# Altium PCB Micromouse2019.PcbDoc (part 1 of 2)
Units mm, origin at the board's own origin, x right, y up, seen from the top; angles counter-clockwise.
Board outline 86.36 x 54.61 mm, 2 copper layers (Top Layer, Bottom Layer), stack 1.58 mm thick; 84 components, 88 nets, 396 pads, 110 vias.
Unrouted connection lines stored in the file: 1.
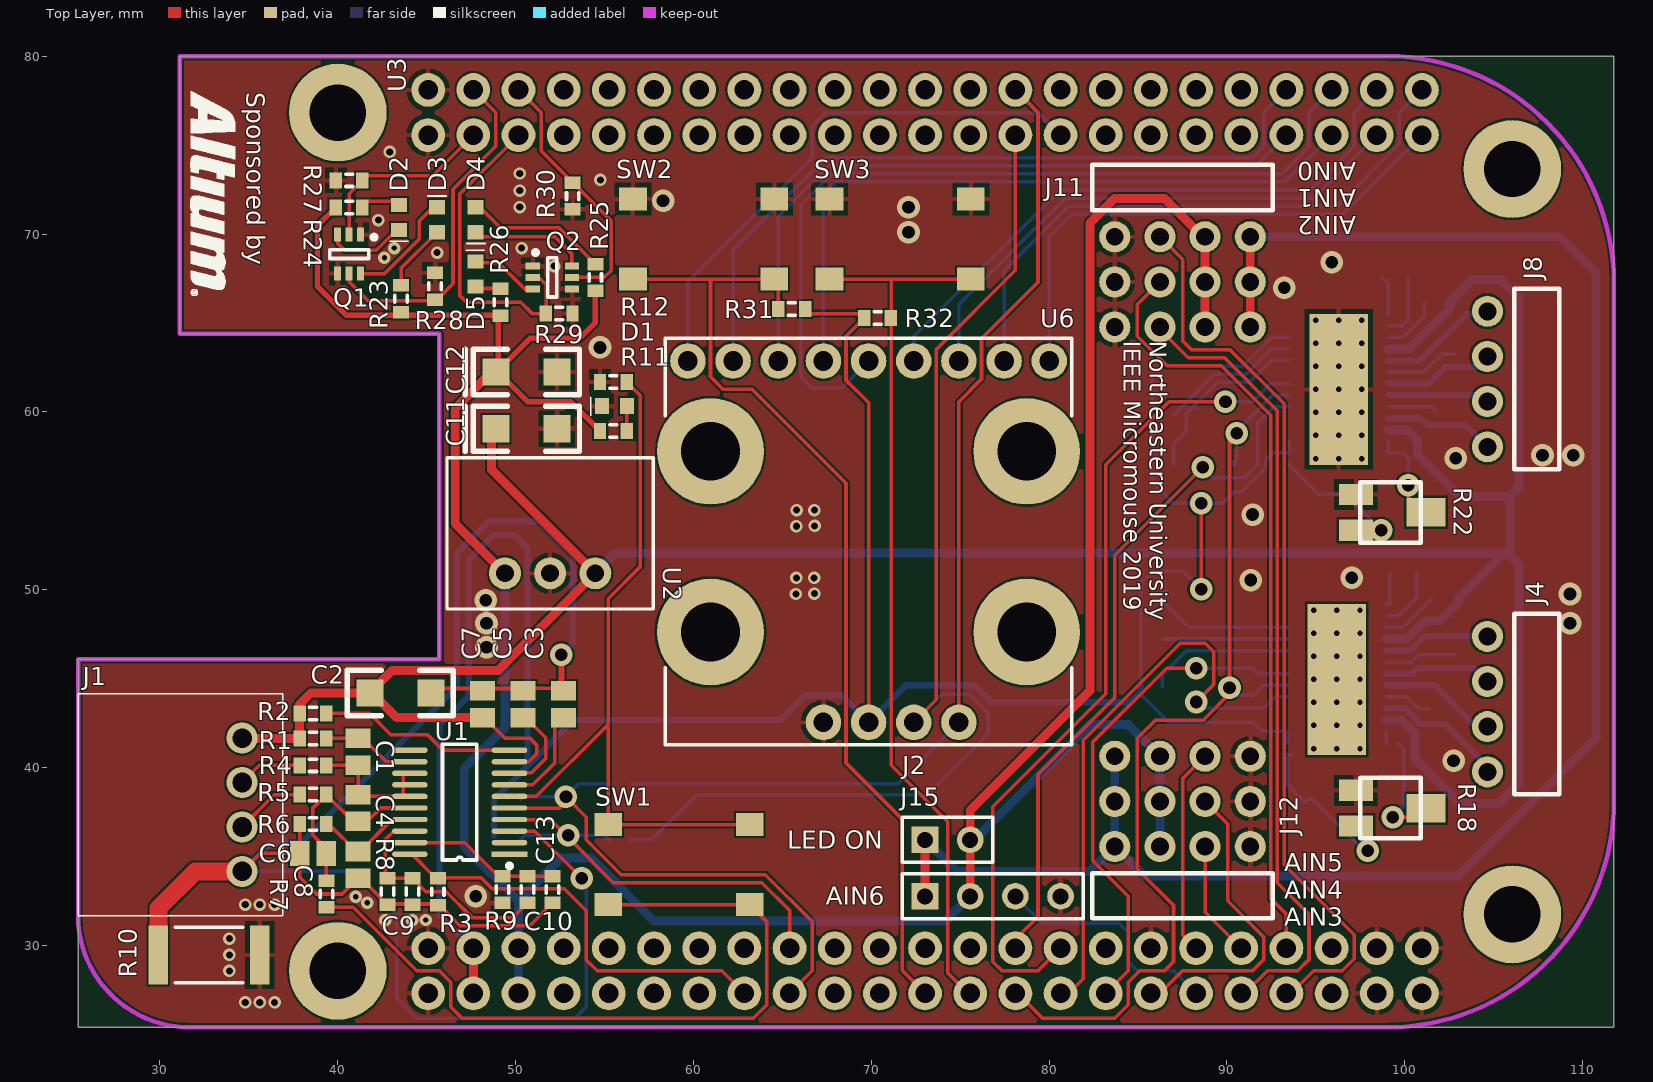
[diagram p0: Top Layer view]
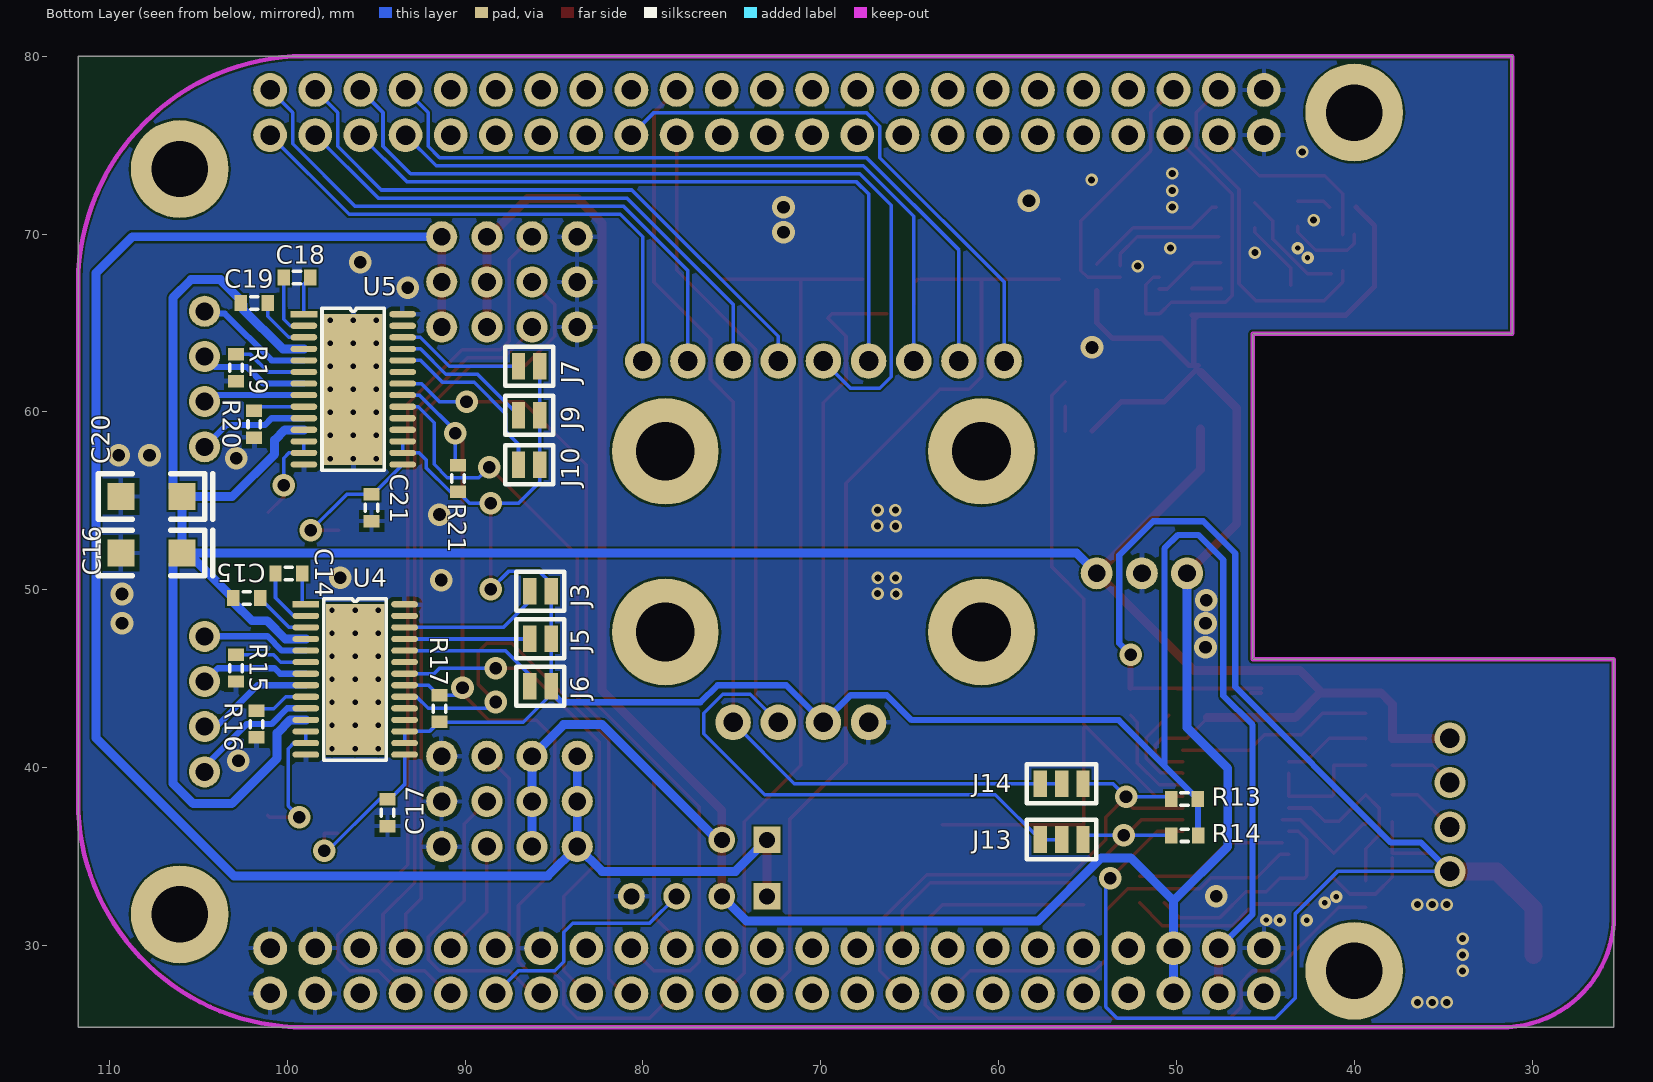
[diagram p1: Bottom Layer view, seen from below]

## Layer stack, top to bottom
Top Solder: solder mask 0.0102, Solder Resist, Dk 3.5
Top Layer: signal copper 0.0356
Dielectric 1: dielectric 1.5086, FR-4, Dk 4.8
Bottom Layer: signal copper 0.0356
Bottom Solder: solder mask 0.0102, Solder Resist, Dk 3.5

## Board outline
25.4,46.101 45.72,46.101 45.72,64.389 31.115,64.389 31.115,80.01 111.76,80.01 111.76,25.4 25.4,25.4

## Design rules (kind name [scope] priority, off if disabled: settings)
Clearance [All] p1: gap=0.127 ignorepadtopadclearanceinfootprint=TRUE
ComponentClearance ComponentClearance_1 [InComponent('U3')] p1: gap=0 collisioncheckmode=3 verticalgap=0 showdistances=FALSE
ComponentClearance [All] p2: gap=0.254 collisioncheckmode=3 verticalgap=0.254 showdistances=FALSE
HoleSize [All] p1: absolutevalues=TRUE maxlimit=6.3 minlimit=0.2 maxpercent=80.000 minpercent=20.000
MinimumAnnularRing [All] p1: minimumring=0.076
MinimumSolderMaskSliver [All] p1: minsoldermaskwidth=0
PolygonConnect [All] p1: thpad.connectstyle=Relief thpad.reliefconductorwidth=0.254 thpad.reliefentries=4 thpad.polygonreliefangle="90 Angle" thpad.airgapwidth=0.254 smdpad.connectstyle=Relief smdpad.reliefconductorwidth=0.254 smdpad.reliefentries=4 smdpad.polygonreliefangle="90 Angle" smdpad.airgapwidth=0.254 via.connectstyle=Direct via.reliefconductorwidth=0.254 via.reliefentries=4 via.polygonreliefangle="90 Angle" via.airgapwidth=0.254
RoutingVias [All] p1: holewidth=0.711 width=1.27 viastyle="Through Hole" minholewidth=0.2 minwidth=0.45 maxholewidth=0.711 maxwidth=1.27
SilkToSilkClearance [All] p1: silktosilkclearance=0
SilkToSolderMaskClearance [IsPad] p1: minsilkscreentomaskgap=0 clearancetoexposedcopper=TRUE
SolderMaskExpansion [All] p1: expansion=0.102
Width [All] p1: maxlimit=10 minlimit=0.127 preferedwidth=0.2
25 further rules are at their usual default settings.

## Classes and differential pairs
component class Peripherals: D2 D3 D4 D5 J11 J12 J13 J14 J15 Q1 Q2 R23 R24 R25 R26 R27 R28 R29 R30 R31 R32 SW2 SW3 U6
component class "Motor Drivers": C14 C15 C16 C17 C18 C19 C20 C21 J3 J4 J5 J6 J7 J8 J9 J10 R15 R16 R17 R18 R19 R20 R21 R22 U4 U5
component class Beaglebone: R13 R14 U3
component class "Battery Management": C1 C2 C3 C4 C5 C6 C7 C8 C9 C10 C11 C12 C13 D1 J1 J2 R1 R2 R3 R4 R5 R6 R7 R8 R9 R10 R11 R12 SW1 U1 U2

## Components (designator, comment, footprint, x,y, rotation, side; value= is the part's Value field where it differs from the comment)
C1 "CAP" C0805 41.148,40.894 r90 top value=1uF
C2 "CAP" 1206 41.808,44.196 r0 top value=10uF
C3 "CAP" C0805 52.705,43.561 r270 top value=1uF
C4 "CAP" C0805 41.148,37.731 r90 top value=1uF
C5 "CAP" C0805 50.419,43.561 r90 top value=4.7uF
C6 "CAP" C0805 38.608,35.179 r0 top value=1uF
C7 "CAP" C0805 48.133,43.561 r270 top value=1uF
C8 "CAP" C0805 41.136,34.532 r270 top value=1uF
C9 "CAP" J1-0603 44.196,33.032 r270 top value=0.1uF
C10 "CAP" J1-0603 50.673,33.147 r270 top value=0.1uF
C11 "CAP POL" 1206+ 48.895,59.055 r0 top value=10uF
C12 "CAP POL" 1206+ 48.895,62.245 r0 top value=10uF
C13 "CAP" J1-0603 52.07,33.147 r90 top value=0.1uF
C14 "CAP" J1-0603 99.908,50.915 r0 bottom value=10nF
C15 "CAP" J1-0603 102.278,49.53 r0 bottom value=0.1uF
C16 "CAP POL" 1206+ 105.918,52.07 r0 bottom value=10uF
C17 "CAP" J1-0603 94.361,37.465 r270 bottom value=0.47uF
C18 "CAP" J1-0603 99.453,67.564 r0 bottom value=10nF
C19 "CAP" J1-0603 101.854,66.13 r0 bottom value=0.1uF
C20 "CAP POL" 1206+ 105.918,55.245 r0 bottom value=10uF
C21 "CAP" J1-0603 95.25,54.61 r270 bottom value=0.47uF
D1 "LED" 0603-DI-GREEN 56.264,60.325 r180 top
D2 "LED" 0603-DI-GREEN 45.593,70.104 r90 top
D3 "LED" 0603-DI-GREEN 43.434,71.631 r270 top
D4 "LED" 0603-DI-GREEN 47.752,71.504 r270 top
D5 "LED" 0603-DI-GREEN 47.752,67.053 r90 top
J1 "JST-XH-4" JST-XH-4 34.62,34.163 r180 top
J2 "Header 2" HDR1X2 73.025,35.941 r0 top
J3 "JUMPER" JUMPER 85.16,49.911 r180 bottom
J4 "CONN_4x1" CONN_4x1 104.648,39.763 r90 top
J5 "JUMPER" JUMPER 85.16,47.244 r180 bottom
J6 "JUMPER" JUMPER 85.16,44.577 r180 bottom
J7 "JUMPER" JUMPER 85.795,62.574 r180 bottom
J8 "CONN_4x1" CONN_4x1 104.648,58.039 r90 top
J9 "JUMPER" JUMPER 85.795,59.817 r180 bottom
J10 "JUMPER" JUMPER 85.795,57.023 r180 bottom
J11 "CONN_4x3" CONN_4x3 91.313,69.85 r180 top
J12 "CONN_4x3" CONN_4x3 83.693,35.56 r0 top
J13 "JUMPER_3" JUMPER_3 56.458,35.959 r180 bottom
J14 "JUMPER_3" JUMPER_3 56.458,39.1 r0 bottom
J15 "CONN_4x1" HDR1X4 73.025,32.766 r0 top
Q1 "RN1907" SOT363-6L 40.64,68.877 r270 top
Q2 "RN1907" SOT363-6L 52.07,67.564 r0 top
R1 "" J1-0603 38.608,41.639 r0 top value=100
R2 "" J1-0603 38.608,43.053 r180 top value=100
R3 "" J1-0603 45.627,33.02 r90 top value=499K
R4 "" J1-0603 38.608,40.132 r0 top value=100
R5 "" J1-0603 38.608,38.481 r0 top value=100
R6 "" J1-0603 38.608,36.83 r0 top value=100
R7 "" J1-0603 39.358,32.894 r270 top value=10K
R8 "" J1-0603 42.799,33.032 r90 top value=100
R9 "" J1-0603 49.276,33.147 r90 top value=100
R10 "" RESC6332 32.766,29.464 r0 top value=50m
R11 "" J1-0603 55.499,58.928 r0 top value=220
R12 "" J1-0603 55.499,61.692 r180 top value=10K
R13 "" J1-0603 49.542,38.227 r180 bottom value=4.7K
R14 "" J1-0603 49.53,36.195 r180 bottom value=4.7K
R15 "" J1-0603 102.87,45.593 r270 bottom value=0.1
R16 "" J1-0603 101.727,42.448 r270 bottom value=0.1
R17 "" J1-0603 91.44,43.319 r270 bottom value=10K
R18 "POT ST32ETB103" ST32-EB 99.2,37.719 r270 top value=10K
R19 "" J1-0603 102.87,62.484 r270 bottom value=0.1
R20 "" J1-0603 101.854,59.309 r270 bottom value=0.1
R21 "" J1-0603 90.398,56.261 r270 bottom value=10K
R22 "POT ST32ETB103" ST32-EB 99.2,54.356 r270 top value=10K
R23 "" J1-0603 43.561,66.367 r270 top value=220
R24 "" J1-0603 40.64,71.501 r180 top value=220
R25 "" J1-0603 54.483,67.564 r270 top value=220
R26 "" J1-0603 49.149,66.167 r270 top value=220
R27 "" J1-0603 40.64,73.025 r0 top value=100K
R28 "" J1-0603 45.465,67.068 r270 top value=100K
R29 "" J1-0603 52.451,65.532 r180 top value=100K
R30 "" J1-0603 53.213,72.136 r90 top value=100K
R31 "" J1-0603 65.532,65.786 r180 top value=10K
R32 "" J1-0603 70.358,65.278 r0 top value=10K
SW1 "TACT SWITCH" "TACT SWITCH" 59.182,34.544 r180 top
SW2 "TACT SWITCH" "TACT SWITCH" 60.579,69.723 r180 top
SW3 "TACT SWITCH" "TACT SWITCH" 71.628,69.723 r180 top
U1 "bq76920" TSSOP20 49.657,35.131 r180 top
U2 "R-78BXX-XX" SIP-3 49.403,50.927 r0 top
U3 "Beaglebone Black" BEAGLEBONE_BLACK 25.4,25.4 r0 top locked
U4 "DRV8825" PP28 98.952,49.183 r180 bottom
U5 "DRV8825" PP28 99.06,65.495 r180 bottom
U6 "LSM9DS1 Breakout" "LSM9DS1 Breakout" 81.28,41.275 r90 top locked

## Footprints (in the part's own frame and the unit in brackets; to place one, negate y for a bottom-side part, rotate by r counter-clockwise, add the part's x,y. Pads: shape width x height; smd on the part's side, far side on the other; paste and mask are expansions set on the pad)
0603-DI-GREEN [mm] "1.6 x 0.8mm"
  rect 0.8x0.9 smd: 1(0,0) 2(1.4,0)
  silkscreen extent 2.04,-0.49 2.04,0.53, body extent -0.1,-0.4 1.5,0.4, height 0.6
1206 [mil]
  rect 60x60 smd: 1(0,0) 2(135,0)
  silkscreen extent -50,-50 185,50, body extent 6,-31 129,31, height 22
1206+ [mil]
  rect 60x60 smd: 1(0,0) 2(135,0)
  silkscreen extent -68,-50 185,50, body extent 0,-31 135,31, height 63
BEAGLEBONE_BLACK [mm]
  round 5.5 hole 3.175: 0(14.605,3.175) 0(14.605,51.435) 0(80.645,6.35) 0(80.645,48.26)
  round 1.9 hole 1.1: P8_1(19.685,50.165) P8_2(19.685,52.705) P8_3(22.225,50.165) P8_4(22.225,52.705) P8_5(24.765,50.165) P8_6(24.765,52.705) P8_7(27.305,50.165) P8_8(27.305,52.705) P8_9(29.845,50.165) P8_10(29.845,52.705) P8_11(32.385,50.165) P8_12(32.385,52.705) P8_13(34.925,50.165) P8_14(34.925,52.705) P8_15(37.465,50.165) P8_16(37.465,52.705) P8_17(40.005,50.165) P8_18(40.005,52.705) P8_19(42.545,50.165) P8_20(42.545,52.705) P8_21(45.085,50.165) P8_22(45.085,52.705) P8_23(47.625,50.165) P8_24(47.625,52.705) P8_25(50.165,50.165) P8_26(50.165,52.705) P8_27(52.705,50.165) P8_28(52.705,52.705) P8_29(55.245,50.165) P8_30(55.245,52.705) P8_31(57.785,50.165) P8_32(57.785,52.705) P8_33(60.325,50.165) P8_34(60.325,52.705) P8_35(62.865,50.165) P8_36(62.865,52.705) P8_37(65.405,50.165) P8_38(65.405,52.705) P8_39(67.945,50.165) P8_40(67.945,52.705) P8_41(70.485,50.165) P8_42(70.485,52.705) P8_43(73.025,50.165) P8_44(73.025,52.705) P8_45(75.565,50.165) P8_46(75.565,52.705) P9_1(19.685,1.905) P9_2(19.685,4.445) P9_3(22.225,1.905) P9_4(22.225,4.445) P9_5(24.765,1.905) P9_6(24.765,4.445) P9_7(27.305,1.905) P9_8(27.305,4.445) P9_9(29.845,1.905) P9_10(29.845,4.445) P9_11(32.385,1.905) P9_12(32.385,4.445) P9_13(34.925,1.905) P9_14(34.925,4.445) P9_15(37.465,1.905) P9_16(37.465,4.445) P9_17(40.005,1.905) P9_18(40.005,4.445) P9_19(42.545,1.905) P9_20(42.545,4.445) P9_21(45.085,1.905) P9_22(45.085,4.445) P9_23(47.625,1.905) P9_24(47.625,4.445) P9_25(50.165,1.905) P9_26(50.165,4.445) P9_27(52.705,1.905) P9_28(52.705,4.445) P9_29(55.245,1.905) P9_30(55.245,4.445) P9_31(57.785,1.905) P9_32(57.785,4.445) P9_33(60.325,1.905) P9_34(60.325,4.445) P9_35(62.865,1.905) P9_36(62.865,4.445) P9_37(65.405,1.905) P9_38(65.405,4.445) P9_39(67.945,1.905) P9_40(67.945,4.445) P9_41(70.485,1.905) P9_42(70.485,4.445) P9_43(73.025,1.905) P9_44(73.025,4.445) P9_45(75.565,1.905) P9_46(75.565,4.445)
C0805 [mm] "Chip Capacitor, Body 2.0x1.3mm, IPC High Density"
  rect 1.1x1.4 smd: 1(-0.75,0) 2(0.75,0)
  body extent -1.1,-0.72 1.1,0.72, height 1.4
CONN_4x1 [mm]
  round 1.75 hole 1.016: 1(0,0) 2(2.54,0) 3(5.08,0) 4(7.62,0)
  silkscreen extent -1.27,-4.04 8.89,-1.5
CONN_4x3 [mm]
  round 1.75 hole 1: 1(0,0) 2(2.54,0) 3(5.08,0) 4(7.62,0) 5(0,2.54) 6(2.54,2.54) 7(5.08,2.54) 8(7.62,2.54) 9(0,5.08) 10(2.54,5.08) 11(5.08,5.08) 12(7.62,5.08)
  silkscreen extent -1.27,-4.04 8.89,-1.5
HDR1X2 [mm] "Connector; Header; 2 Position"
  rect 1.5x1.5 hole 0.9: 1(0,0)
  round 1.5 hole 0.9: 2(2.54,0)
  silkscreen extent -1.27,-1.27 3.81,1.27
HDR1X4 [mm] "Connector; Header; 4 Position"
  rect 1.5x1.5 hole 0.9: 1(0,0)
  round 1.5 hole 0.9: 2(2.54,0) 3(5.08,0) 4(7.62,0)
  silkscreen extent -1.27,-1.27 8.89,1.27
J1-0603 [mm] "Chip Resistor, Body 1.6x0.8mm, IPC High Density"
  rect 0.7x0.9 smd: 1(-0.75,0) 2(0.75,0)
  silkscreen extent -0.2,-0.35 0.2,0.35, body extent -0.85,-0.48 0.85,0.48, height 0.9
JST-XH-4 [mm]
  round 1.75 hole 1.1: 1(0,-7.5) 2(0,-5) 3(0,-2.5) 4(0,0)
  silkscreen extent -2.3,-10 9.2,2.5, body extent -2.3,-9.95 9.2,2.45, height 6.15
JUMPER [mm]
  rect 0.75x1.5 smd: 1(-1.2,0) 2(0,0)
  silkscreen extent -1.95,-1.1 0.75,1.1
JUMPER_3 [mm]
  rect 0.75x1.5 smd: 1(-1.2,0) 2(0,0) 3(1.2,0)
  silkscreen extent -1.95,-1.1 1.95,1.1
"LSM9DS1 Breakout" [mm]
  round 6 hole 3.3: 0(6.35,20.32) 0(6.35,2.54) 0(16.51,2.54) 0(16.51,20.32)
  round 2 hole 1.1: 1(1.27,13.97) 2(1.27,11.43) 3(1.27,8.89) 4(1.27,6.35) 5(21.59,1.27) 6(21.59,3.81) 7(21.59,6.35) 8(21.59,8.89) 9(21.59,11.43) 10(21.59,13.97) 11(21.59,16.51) 12(21.59,19.05) 13(21.59,21.59)
  silkscreen extent 0,0 22.86,22.86
PP28 [mm]
  rect 1.5x0.35 smd: 1(0,0)
  oval 1.5x0.35 smd: 2(0,-0.65) 3(0,-1.3) 4(0,-1.95) 5(0,-2.6) 6(0,-3.25) 7(0,-3.9) 8(0,-4.55) 9(0,-5.2) 10(0,-5.85) 11(0,-6.5) 12(0,-7.15) 13(0,-7.8) 14(0,-8.45) 15(5.55,-8.45) 16(5.55,-7.8) 17(5.55,-7.15) 18(5.55,-6.5) 19(5.55,-5.85) 20(5.55,-5.2) 21(5.55,-4.55) 22(5.55,-3.9) 23(5.55,-3.25) 24(5.55,-2.6) 25(5.55,-1.95) 26(5.55,-1.3) 27(5.55,-0.65) 28(5.55,0)
  rect 3.3x8.5 all layers, no hole: 29(2.775,-4.225)
  silkscreen extent 1.02,-8.78 4.52,0.33, body extent 0.53,-9.13 5.02,0.67, height 1.2
RESC6332 [mm] "Chip Resistor, Body 6.3x3.2mm, IPC High Density"
  rect 1.1x3.3 smd: 1(-2.85,0) 2(2.85,0)
  silkscreen extent -1.9,-1.55 1.9,1.55, body extent -3.22,-1.68 3.22,1.68, height 0.9
SIP-3 [mm]
  round 1.8 hole 1: 1(5.08,0) 2(2.54,0) 3(0,0)
  silkscreen extent -3.26,-2 8.34,6.5, body extent -3.26,-2 8.34,6.5, height 10.4
SOT363-6L [mm] "SOT363, 6-Leads, Body 2x1.3mm, Pitch 0.65mm, Lead Span 2.1mm, IPC High Density"
  rect 0.8x0.4 smd: 1(-1.1,0.65) 2(-1.1,0) 3(-1.1,-0.65) 4(1.1,-0.65) 5(1.1,0) 6(1.1,0.65)
  silkscreen extent -1.07,-1.1 0.25,1.53, body extent -1.15,-1.1 1.15,1.1, height 1
ST32-EB [mm]
  rect 1.2x1.9 smd: 1(1,-1.95) 3(-1,-1.95)
  rect 1.6x2.2 smd: 2(0,2)
  silkscreen extent -1.7,-1.7 1.7,1.7, body extent -1.7,-2.17 1.7,2.23, height 2
"TACT SWITCH" [mm]
  rect 1.55x1.3 smd: 1(-3.975,2.25) 2(3.975,2.25) 3(-3.975,-2.25) 4(3.975,-2.25)
  body extent -3,-3 3,3, height 5
TSSOP20 [mm]
  rect 2x0.3 smd: 1(0,0)
  oval 2x0.3 smd: 2(0,-0.65) 3(0,-1.3) 4(0,-1.95) 5(0,-2.6) 6(0,-3.25) 7(0,-3.9) 8(0,-4.55) 9(0,-5.2) 10(0,-5.85) 11(5.6,-5.85) 12(5.6,-5.2) 13(5.6,-4.55) 14(5.6,-3.9) 15(5.6,-3.25) 16(5.6,-2.6) 17(5.6,-1.95) 18(5.6,-1.3) 19(5.6,-0.65) 20(5.6,0)
  silkscreen extent -0.13,-6.18 3.76,0.79, body extent 0.6,-6.17 5,0.33, height 1.2

## Part data
C1 C3 C4 C6 C7 C8: "CAP CER 1UF 25V X7R 0805", Manufacturer="Murata Electronics North America", Manufacturer Part Number=GCM21BR71E105KA56L, Operating Temperature="-55°C ~ 125°C", Package / Case="0805 (2012 Metric)", Ratings=AEC-Q200, Supplier Part Number 1=490-4785-1-ND, Temperature Coefficient=X7R, Tolerance=±10%, Voltage - Rated=25V, Applications=Automotive, Category=Capacitors, ComponentLink1Description=http://search.murata.co.jp/Ceramy/image/img/A01X/G101/ENG/GCM21BR71E105KA56-01.pdf, ComponentLink1URL=http://search.murata.co.jp/Ceramy/image/img/A01X/G101/ENG/GCM21BR71E105KA56-01.pdf, Features=-, Height - Seated (Max)=-, Lead Spacing=-, Lead Style=-, Mounting Type="Surface Mount, MLCC", Packaging="Cut Tape (CT)", Part Status=Active, Pricing 1="1=0.29, 10=0.198, 100=0.1122, 500=0.07918, 1000=0.06927 (USD)", RoHS="RoHS Compliant", Size / Dimension="0.079\" L x 0.049\" W (2.00mm x 1.25mm)", Stock 1=30000, Supplier 1=Digi-Key, Thickness (Max)="0.055\" (1.40mm)"
C2: "CAP CER 10UF 50V X5R 1206", Manufacturer="Murata Electronics North America", Manufacturer Part Number=GRT31CR61H106KE01L, Operating Temperature="-55°C ~ 85°C", Package / Case="1206 (3216 Metric)", Ratings=AEC-Q200, Supplier Part Number 1=490-12456-1-ND, Temperature Coefficient=X5R, Tolerance=±10%, Voltage - Rated=50V, Applications=Automotive, Category=Capacitors, ComponentLink1Description=http://search.murata.co.jp/Ceramy/image/img/A01X/G101/ENG/GRT31CR61H106KE01-01.pdf, ComponentLink1URL=http://search.murata.co.jp/Ceramy/image/img/A01X/G101/ENG/GRT31CR61H106KE01-01.pdf, Features=-, Height - Seated (Max)=-, Lead Spacing=-, Lead Style=-, Mounting Type="Surface Mount, MLCC", Packaging="Cut Tape (CT)", Part Status=Active, Pricing 1="1=0.89, 10=0.633, 100=0.4166, 500=0.30856, 1000=0.26228 (USD)", RoHS="RoHS Compliant", Size / Dimension="0.126\" L x 0.063\" W (3.20mm x 1.60mm)", Stock 1=20000, Supplier 1=Digi-Key, Thickness (Max)="0.071\" (1.80mm)"
C5: "CAP CER 4.7UF 10V X7R 0805", Manufacturer="Samsung Electro-Mechanics", Manufacturer Part Number=CL21B475KPFNNNE, Operating Temperature="-55°C ~ 125°C", Package / Case="0805 (2012 Metric)", Ratings=-, Supplier Part Number 1=1276-2972-1-ND, Temperature Coefficient=X7R, Tolerance=±10%, Voltage - Rated=10V, Applications="General Purpose", Category=Capacitors, ComponentLink1Description=http://www.samsungsem.com/kr/support/product-search/mlcc/CL21B475KPFNNNE.jsp, ComponentLink1URL=http://www.samsungsem.com/kr/support/product-search/mlcc/CL21B475KPFNNNE.jsp, Features=-, Height - Seated (Max)=-, Lead Spacing=-, Lead Style=-, Mounting Type="Surface Mount, MLCC", Notification="Current market demand for these product types have resulted in fluctuating and extending lead times. Lead times may differ.", Packaging="Cut Tape (CT)", Part Status=Active, Pricing 1="1=0.28, 10=0.19, 100=0.0963, 500=0.06588, 1000=0.05828 (USD)", RoHS="RoHS Compliant", Size / Dimension="0.079\" L x 0.049\" W (2.00mm x 1.25mm)", Stock 1=20000, Supplier 1=Digi-Key, Thickness (Max)="0.053\" (1.35mm)"
C9 C10 C13 C15 C19: "CAP CER 0.1UF 50V X7R 0603", Supplier Part Number 1=399-6856-1-ND, Voltage Rating=50V, Supplier 1=Digi-Key
C11 C12 C16 C20: "CAP TANT 10UF 10% 20V 1206", Supplier Part Number 1=478-8273-1-ND, Voltage Rating=20V, LatestRevisionDate=17-Jul-2002, LatestRevisionNote="Re-released for DXP Platform.", PackageDescription="Polarized Capacitor (Radial); 2 Leads", PackageReference=RB7.6-15, Published=8-Jun-2000, Publisher="Altium Limited", Supplier 1=Digi-Key
C14 C18: "CAP CER 10000PF 50V X7R 0603", Supplier Part Number 1=311-1085-1-ND, Voltage Rating=50V, Supplier 1=Digi-Key
C17 C21: "CAP CER 0.47UF 16V X7R 0603", Supplier Part Number 1=490-3295-1-ND, Voltage Rating=16V, Supplier 1=Digi-Key
D1: "LED GREEN CLEAR CHIP SMD", Supplier Part Number 1=160-1888-1-ND, LatestRevisionDate=17-Jul-2002, LatestRevisionNote="Re-released for DXP Platform.", PackageDescription="SM LED; 2 Flat Leads", PackageReference=3.2X1.6X1.1, PackageVersion=Feb-2002, Published=8-Jun-2000, Publisher="Altium Limited", Supplier 1=Digi-Key
D2 D3 D4 D5: "LED BLUE CLEAR CHIP SMD", Supplier Part Number 1=160-1647-1-ND, LatestRevisionDate=17-Jul-2002, LatestRevisionNote="Re-released for DXP Platform.", PackageDescription="SM LED; 2 Flat Leads", PackageReference=3.2X1.6X1.1, PackageVersion=Feb-2002, Published=8-Jun-2000, Publisher="Altium Limited", Supplier 1=Digi-Key
J1: "CONN HEADER R/A 4POS 2.5MM", Current Rating=3A, Insulation Color=Natural, Manufacturer="JST Sales America Inc.", Manufacturer Part Number=S4B-XH-A(LF)(SN), Material Flammability Rating="UL94 V-0", Operating Temperature="-25°C ~ 85°C", Supplier Part Number 1=455-2243-ND, Voltage Rating=250V, Applications=-, Category="Connectors, Interconnects", ComponentLink1Description=http://www.jst-mfg.com/product/pdf/eng/eXH.pdf, ComponentLink1URL=http://www.jst-mfg.com/product/pdf/eng/eXH.pdf, Connector Type=Header, Contact Finish - Mating=Tin, Contact Finish - Post=Tin, Contact Finish Thickness - Mating=-, Contact Finish Thickness - Post=-, Contact Length - Mating=-, Contact Length - Post="0.134\" (3.40mm)", Contact Material=Brass, Contact Shape=Square, Contact Type="Male Pin", Fastening Type="Detent Lock", Features=-, Ingress Protection=-, Insulation Height="0.240\" (6.10mm)", Insulation Material="Polyamide (PA66), Nylon 6/6", Mated Stacking Heights=6.1mm, Mounting Type="Through Hole, Right Angle", Number of Positions=4, Number of Positions Loaded=All, Number of Rows=1, Overall Contact Length=-, Packaging=Bulk, Part Status=Active, Pitch - Mating="0.098\" (2.50mm)", Pricing 1="1=0.27, 10=0.257, 100=0.1785, 500=0.151, 1000=0.12355, 5000=0.10982, 10000=0.09953 (USD)", RoHS="RoHS Compliant", Row Spacing - Mating=-, Shrouding="Shrouded - 4 Wall", Stock 1=46156, Style="Board to Cable/Wire", Supplier 1=Digi-Key, Termination="Press-Fit, Solder"
J2: "Header, 2-Pin", LatestRevisionDate=17-Jul-2002, LatestRevisionNote="Re-released for DXP Platform.", Publisher="Altium Limited"
J4 J8: "CONN HEADER 4POS .100 R/A 30AU", Current Rating=-, Insulation Color=Black, Manufacturer="Amphenol FCI", Manufacturer Part Number=68016-104HLF, Material Flammability Rating="UL94 V-0", Supplier Part Number 1=609-3312-ND, Applications=-, Category="Connectors, Interconnects", ComponentLink1Description=http://cdn.amphenol-icc.com/media/wysiwyg/files/drawing/68015.pdf, ComponentLink1URL=http://cdn.amphenol-icc.com/media/wysiwyg/files/drawing/68015.pdf, Connector Type=Header, Contact Finish - Mating="Gold or Gold, GXT™", Contact Finish - Post=-, Contact Finish Thickness - Mating="30µin (0.76µm)", Contact Finish Thickness - Post=-, Contact Length - Mating="0.230\" (5.84mm)", Contact Length - Post="0.120\" (3.05mm)", Contact Material="Phosphor Bronze", Contact Shape=Square, Contact Type="Male Pin", Fastening Type=Push-Pull, Features=-, Ingress Protection=-, Insulation Height="0.095\" (2.41mm)", Insulation Material=-, Mated Stacking Heights=-, Mounting Type="Through Hole, Right Angle", Number of Positions=4, Number of Positions Loaded=All, Number of Rows=1, Operating Temperature=-, Overall Contact Length=-, Packaging=Bulk, Part Status=Active, Pitch - Mating="0.100\" (2.54mm)", Pricing 1="1=0.41, 10=0.385, 100=0.2697, 500=0.23122, 1000=0.19268, 5000=0.16515, 10000=0.15414 (USD)", RoHS="RoHS Compliant", Row Spacing - Mating=-, Shrouding=Unshrouded, Stock 1=5255, Style="Board to Board", Supplier 1=Digi-Key, Termination=Solder, Voltage Rating=-
J11 J12: "CONN HEADER R/A 12POS 2.54MM", Supplier Part Number 1=SAM8998-ND, Supplier 1=Digi-Key
Q1 Q2: "TRANS 2NPN PREBIAS 0.2W US6", Supplier Part Number 1=RN1907LF(CTCT-ND, Supplier 1=Digi-Key
R1 R2 R4 R5 R6 R8 R9: library part Res1, "RES SMD 100 OHM 1% 1/10W 0603", Supplier Part Number 1=311-100HRCT-ND, Tolerance=1%, Supplier 1=Digi-Key
R3: library part Res1, "RES SMD 499K OHM 1% 1/10W 0603", Supplier Part Number 1=311-499KHRCT-ND, Supplier 1=Digi-Key
R7 R12 R17 R21 R31 R32: library part Res1, "RES SMD 10K OHM 5% 1/10W 0603", Supplier Part Number 1=311-10KGRCT-ND, Supplier 1=Digi-Key
R10: library part Res1, "RES 0.05 OHM 1% 1W 2512", Power Rating=1W, Supplier Part Number 1=311-0.05TCT-ND, Tolerance=1%, Supplier 1=Digi-Key
R11 R23 R24 R25 R26: library part Res1, "RES SMD 220 OHM 5% 1/10W 0603", Supplier Part Number 1=311-220GRCT-ND, Supplier 1=Digi-Key
R13 R14: library part Res1, "RES SMD 4.7K OHM 5% 1/10W 0603", Supplier Part Number 1=311-4.7KGRCT-ND, Supplier 1=Digi-Key
R15 R16 R19 R20: library part Res1, "RES 0.1 OHM 1% 1/3W 0603", Supplier Part Number 1=P17478CT-ND, Supplier 1=Digi-Key
R18 R22: "10K Trimmer Potentiometer", Supplier Part Number 1=ST32ETB103CT-ND, LatestRevisionDate=17-Jul-2002, LatestRevisionNote="Re-released for DXP Platform.", PackageDescription="Variable Resistor, Thru-Hole; 3 Leads", PackageReference=VR5, Published=8-Jun-2000, Publisher="Altium Limited", Set Position=0.5, Sim Note="Enter the Resistance value and the set point into parameter fields.", Supplier 1=Digi-Key
R27 R28 R29 R30: library part Res1, "RES SMD 100K OHM 5% 1/10W 0603", Supplier Part Number 1=311-100KGRCT-ND, Supplier 1=Digi-Key
SW1 SW2 SW3: "SWITCH TACTILE SPST-NO 0.05A 12V", Contact Rating @ Voltage="0.05A @ 12VDC", Illumination Type, Color=-, Manufacturer=C&K, Manufacturer Part Number="PTS645SL50SMTR92 LFS", Operating Force=130gf, Operating Temperature="-20°C ~ 60°C", Supplier Part Number 1=CKN9088CT-ND, Actuator Height off PCB, Vertical=5.00mm, Actuator Length, Right Angle=-, Actuator Material="Polyamide (PA66), Nylon 6/6", Actuator Orientation="Top Actuated", Actuator Type=Standard, Category=Switches, Circuit=SPST-NO, ComponentLink1Description=https://www.ckswitches.com/media/1471/pts645.pdf, ComponentLink1URL=https://www.ckswitches.com/media/1471/pts645.pdf, Features=-, Illumination=Non-Illuminated, Illumination Voltage (Nominal)=-, Ingress Protection=-, Mechanical Life="100,000 Cycles", Mounting Type="Surface Mount", Outline="6.00mm x 6.00mm", Packaging="Cut Tape (CT)", Part Status=Active, Pricing 1="1=0.22, 10=0.215, 25=0.2076, 50=0.2002, 100=0.1891, 250=0.17796, 500=0.17054 (USD)", RoHS="RoHS Compliant", Stock 1=42939, Supplier 1=Digi-Key, Switch Function=Off-Mom, Switch Travel=-, Termination Style="Gull Wing"
U1: "IC BATT MGMT LI-ION AFE 20TSSOP", Supplier Part Number 1=296-39960-1-ND, Supplier 1=Digi-Key
U2: "DC DC CONVERTER 5V", Current - Output (Max)=2A, Manufacturer="Recom Power", Manufacturer Part Number=R-78B5.0-2.0, Operating Temperature="-40°C ~ 70°C", Package / Case="3-SIP Module", Supplier Device Package=-, Supplier Part Number 1=945-3042-ND, Voltage - Input (Max)=32V, Voltage - Input (Min)=6.5V, Voltage - Output 1=5V, Applications="ITE (Commercial)", Category="Power Supplies - Board Mount", ComponentLink1Description=https://www.recom-power.com/pdf/Innoline/R-78Bxx-2.0.pdf, ComponentLink1URL=https://www.recom-power.com/pdf/Innoline/R-78Bxx-2.0.pdf, Control Features=-, Efficiency=94%, Features="OTP, SCP", Mounting Type="Through Hole", Packaging=Tube, Part Status=Active, Pricing 1="1=9.87, 5=9.792, 10=9.718, 42=9.5681, 84=9.26905, 126=8.37198, 252=8.2225, 504=8.073 (USD)", RoHS="RoHS Compliant", Size / Dimension="0.45\" L x 0.33\" W x 0.69\" H (11.5mm x 8.5mm x 17.5mm)", Stock 1=3257, Supplier 1=Digi-Key, Type="Linear Regulator Replacement", Voltage - Output 2=-, Voltage - Output 3=-
U4 U5: "IC MOTOR DRIVER PAR 28HTSSOP", Current - Output=2.5A, Manufacturer="Texas Instruments", Manufacturer Part Number=DRV8825PWPR, Operating Temperature="-40°C ~ 150°C (TJ)", Package / Case="28-TSSOP (0.173\", 4.40mm Width) Exposed Pad", Supplier Device Package=28-HTSSOP, Supplier Part Number 1=296-29503-1-ND, Voltage - Load="8.2 V ~ 45 V", Applications="General Purpose", Category="Integrated Circuits (ICs)", ComponentLink1Description=http://www.ti.com/lit/ds/symlink/drv8825.pdf, ComponentLink1URL=http://www.ti.com/lit/ds/symlink/drv8825.pdf, Function="Driver - Fully Integrated, Control and Power Stage", Interface=Logic, Motor Type - AC, DC=-, Motor Type - Stepper=Bipolar, Mounting Type="Surface Mount", Output Configuration="Half Bridge (4)", Packaging="Cut Tape (CT)", Part Status=Active, Pricing 1="1=3.93, 10=3.53, 100=2.8922, 500=2.46212, 1000=2.07648 (USD)", RoHS="RoHS Compliant", Step Resolution="1 ~ 1/32", Stock 1=21013, Supplier 1=Digi-Key, Technology="Power MOSFET", Voltage - Supply="8.2 V ~ 45 V"
U6: "SPARKFUN 9 DEGREES OF FREEDOM IM", Supplier Part Number 1=1568-1257-ND, Supplier 1=Digi-Key

## Via types
v1: diameter 0.7, hole 0.3, Top Layer to Bottom Layer, 42 vias
v2: diameter 1.27, hole 0.711, Top Layer to Bottom Layer, tented both sides, 35 vias
v3: diameter 0.7, hole 0.4, Top Layer to Bottom Layer, tented both sides, 26 vias
v4: diameter 0.7, hole 0.3, Top Layer to Bottom Layer, tented both sides, 7 vias

## Nets (pads, with @x,y where several pads share a name; then routed paths per layer and width w, separated by ;. In a path a pad name is that pad's centre, name@x,y a point inside that pad or via, vN(x,y) a via of type N, cw(c..) or ccw(c..) an arc to the next point about the centre after c; other vN are vias at no path point)
3.3V: J3.2 J5.2 J6.2 J7.2 J9.2 J10.2 R13.2 R14.2 R17.2 R21.2 R31.1 R32.1 U3.P9_3 U3.P9_4 U4.16 U4.17 U5.16 U5.17 U6.2 | length 154.3
  Top Layer w0.2: R31.1@66.294,65.532 69.354,65.532 R32.1 68.58,64.25 68.58,61.778 69.85,60.508 U6.2 ; v2(88.546,50.038) v2(88.546,54.864)
  Top Layer w0.5: U3.P9_3 U3.P9_4
  Bottom Layer w0.2: J7.2 J9.2 J10.2 85.795,56.064 86.995,54.864 v2(88.546,54.864) 89.751,54.864 R21.2 90.841,55.511 92.194,56.864 92.194,57.307 92.582,57.695 U5.16 U5.17 ; v2(88.546,50.038) 87.53,51.054 85.852,51.054 85.16,50.362 J3.2 J5.2 J6.2 85.16,44.126 86.729,42.557 91.478,42.557 92.002,42.033 U4.17 U4.16
  Bottom Layer w0.35: U3.P9_4 45.72,31.75 45.72,42.399 47.362,44.041 47.362,51.68 48.768,53.086 49.911,53.086 50.673,52.324 50.673,40.166 ; R14.2 R13.2@48.78,38.227 ; R13.2 53.237,42.672 64.897,42.672 66.294,44.069 68.326,44.069 U6.2 71.938,44.633 75.804,44.633 76.766,43.671 84.565,43.671 85.16,44.266 J6.2
5V: C12.1 J2.2 J11.2 J11.6 J11.10 J12.2 J12.6 J12.10 J15.2 R11.1 R23.2 R24.2 R25.2 R26.2 U2.3 U3.P9_5 U3.P9_6 | length 175.4
  Top Layer w0.2: J11.2@88.646,69.85 J11.2
  Top Layer w0.3: R24.2 38.862,70.473 38.862,67.044 40.465,65.441 R26.2@49.125,65.441 ; C12.1@48.768,62.611 49.288,62.611 50.812,64.135 53.594,64.135 54.483,65.024 R25.2 ; R26.2@48.768,65.441 49.022,65.187 49.022,62.599 48.838,62.414 50.673,60.579 53.098,60.579 R11.1
  Top Layer w0.5: C12.1@48.641,62.23 46.609,60.198 46.609,53.721 U2.3 ; J15.2 J2.2 75.565,37.592 82.296,44.323 82.296,70.612 83.693,72.009 86.487,72.009 J11.2@88.646,69.85 ; J11.10 J11.6 J11.2
  Bottom Layer w0.2: J15.2@75.565,32.639 J15.2
  Bottom Layer w0.5: U2.3 49.403,42.251 47.117,39.965 47.117,35.56 50.165,32.512 ; U3.P9_5 U3.P9_6 50.165,32.512 ; J15.2 74.168,31.369 57.785,31.369 54.229,34.925 52.578,34.925 50.165,32.512 ; J2.2 75.819,35.941 82.296,42.418 84.455,42.418 J12.10 J12.6 J12.2
AIN0: J11.3 U3.P9_39 | length 51.6
  Top Layer w0.2: J11.3 87.503,68.58 87.503,64.008 88.011,63.5 90.17,63.5 93.218,60.452 93.218,34.544 97.155,30.607 97.155,29.255 96.475,28.575 94.888,28.575 93.618,27.305 U3.P9_39
  Bottom Layer w0.2: J11.3@85.598,69.85 J11.3
AIN1: J11.7 U3.P9_40 | length 43.9
  Top Layer w0.2: J11.7 84.963,66.04 84.963,64.262 86.633,62.592 89.681,62.592 92.456,59.817 92.456,32.639 93.345,31.75 U3.P9_40
  Bottom Layer w0.2: J11.7@85.598,67.31 J11.7
AIN2: J11.11 U3.P9_37 | length 45.5
  Top Layer w0.2: J11.11@86.166,64.703 87.823,63.046 89.862,63.046 92.837,60.071 92.837,33.528 94.615,31.75 94.615,29.21 93.98,28.575 92.277,28.575 91.007,27.305 U3.P9_37 ; J11.11 J11.11@86.922,64.77
AIN3: J12.3 U3.P9_38 | length 6.6
  Top Layer w0.2: J12.3 88.773,31.877 U3.P9_38
AIN4: J12.7 U3.P9_33 | length 17.4
  Top Layer w0.2: U3.P9_33 86.233,27.305 87.503,28.575 91.44,28.575 92.075,29.21 92.075,30.48 90.043,32.512 90.043,36.83 J12.7
AIN5: J12.11 U3.P9_36 | length 11.6
  Top Layer w0.2: U3.P9_36 87.503,30.607 87.503,39.37 J12.11
AIN6: J15.3 U3.P9_35 | length 13.4
  Bottom Layer w0.2: J15.3 79.629,31.242 83.947,31.242 84.455,30.734 84.455,29.083 84.963,28.575 86.995,28.575 U3.P9_35
BAT: R2.1 U1.10 | length 11.2
  Top Layer w0.2: R2.1 41.783,43.053 42.989,41.846 45.045,41.846 45.91,40.981 U1.10
BAT_GND: C2.2 C3.1 C5.2 C6.1 C7.1 C8.2 C9.2 C13.1 J1.4 R3.1 R6.1 R8.1 R10.1 U1.3 | length 117.1
  Top Layer w0.2: J1.4 35.636,35.179 C6.1 R6.1 R6.1@37.858,36.957 ; C6.1@37.858,34.925 37.858,33.843 38.807,32.894 40.248,32.894 C8.2 41.299,33.782 R8.1@42.75,32.331 ; R8.1@42.599,32.331 R8.1@42.75,32.331 ; R8.1 R8.1@42.75,32.331 ; C2.2@45.212,44.45 C5.2@49.948,44.45 ; C2.2 C2.2@45.825,44.196 ; R3.1 45.566,32.331 R8.1@42.75,32.331 ; R3.1@45.945,32.033 46.863,31.115 50.788,31.115 C13.1 ; U1.3 51.072,36.431 v2(53.721,33.782) ; C5.2@49.948,44.472 C3.1@52.578,44.472
  Top Layer w0.35: C3.1@52.578,44.472 v2(52.578,46.355)
  Top Layer w1: R10.1 29.916,32.088 31.991,34.163 J1.4
  Bottom Layer w0.2: J1.4 40.943,34.163 43.307,31.799 43.307,27.051 44.45,25.908 53.34,25.908 53.975,26.543 53.975,33.528 v2(53.721,33.782)
  Bottom Layer w0.35: J1.4 36.245,35.788 37.939,35.788 46.698,44.547 46.698,52.048 48.498,53.848 51.308,53.848 53.213,51.943 53.213,46.99 v2(52.578,46.355)
BMS_ALERT: R3.2 U1.20 U3.P9_15 | length 24.1
  Top Layer w0.2: U1.20@43.676,35.131 U1.20 44.174,35.131 45.489,33.816 48.056,33.816 48.679,33.193 52.74,33.193 53.975,31.958 53.975,29.186 54.586,28.575 61.595,28.575 U3.P9_15
BUT1: R31.2 SW2.1 SW2.2 U3.P9_23 | length 55.4
  Top Layer w0.2: SW2.2 60.96,67.473 ; SW2.1@64.389,67.473 60.96,67.473 ; SW2.1 64.782,67.245 R31.2@64.782,66.04 ; U3.P9_23 71.755,28.575 71.755,37.084 68.58,40.259 68.58,55.988 63.298,61.27 61.666,61.27 60.96,61.976 60.96,67.473
BUT2: R32.2 SW3.1 SW3.2 U3.P9_25 | length 50
  Top Layer w0.2: SW3.2 SW3.1 ; 71.12,67.437 71.12,40.132 74.295,36.957 74.295,28.448 75.438,27.305 U3.P9_25
GND: C11.2 C12.2 C16.2 C17.2 C20.2 C21.2 D1.2 J11.4 J11.8 J11.12 J12.4 J12.8 J12.12 J15.4 Q1.1 Q1.4 Q2.1 Q2.4 R9.1 R10.2 R12.2 R15.2 R16.2 R18.3 R19.2 R20.2 R22.3 R27.1 R28.1 R29.1 R30.1 SW2.3 SW2.4 SW3.3 SW3.4 U2.2 U3.P8_1 U3.P8_2 U3.P9_1 U3.P9_2 U3.P9_34 U3.P9_43 U3.P9_44 U3.P9_45 U3.P9_46 U4.14 U4.28 U4.29 U5.14 U5.28 U5.29 U6.1
  other v1: 94.888,41.055 96.183,41.055 97.479,41.055 94.888,42.376 96.183,42.376 97.479,42.376 94.888,43.671 96.183,43.671 97.479,43.671 94.888,44.967 96.183,44.967 97.479,44.967 94.888,46.262 96.183,46.262 97.479,46.262 94.888,47.557 96.183,47.557 97.479,47.557 94.888,48.853 96.183,48.853 97.479,48.853 94.996,57.367 96.291,57.367 97.587,57.367 94.996,58.688 96.291,58.688 97.587,58.688 94.996,59.983 96.291,59.983 97.587,59.983 94.996,61.279 96.291,61.279 97.587,61.279 94.996,62.574 96.291,62.574 97.587,62.574 94.996,63.869 96.291,63.869 97.587,63.869 94.996,65.165 96.291,65.165 97.587,65.165
  other v2: 47.752,32.766 102.743,40.386 48.367,46.772 48.367,48.116 109.29,48.116 48.314,49.403 109.29,49.764 91.348,50.546 97.026,50.673 91.44,54.229 102.87,57.404 107.741,57.562 109.474,57.562 54.749,63.627 93.218,66.987 95.885,68.41 72.096,70.104 72.096,71.513 58.293,71.882
  other v3: 34.798,26.797 35.616,26.797 36.449,26.797 33.905,28.575 33.909,29.467 33.909,30.388 34.799,32.294 35.617,32.294 36.45,32.294 65.767,49.764 66.8,49.784 65.786,50.673 66.783,50.673 65.786,53.574 66.819,53.594 65.805,54.483 66.802,54.483 52.178,68.199 45.592,68.961 50.337,69.215 42.291,70.782 50.238,71.513 50.238,72.448 54.765,73.046 50.238,73.406 42.926,74.624
  other v4: 42.672,31.425 44.196,31.425 44.958,31.432 41.668,32.397 41.006,32.73 42.628,68.668 43.18,69.215
I2C1_SCL: J14.1 R13.1 U1.5 U3.P9_17 | length 31.2
  Top Layer w0.2: U1.5 49.669,37.719 52.439,37.719 52.832,38.112 v2(52.832,38.354) 53.975,37.211 53.975,35.953 55.946,33.982 64.037,33.982 66.675,31.344 66.675,28.575 U3.P9_17
  Bottom Layer w0.2: R13.1 50.419,38.354 v2@52.82,38.354 ; v2@52.832,38.088 v2(52.832,38.354) v2@52.82,38.354 ; J14.1 53.566,39.1 v2@52.82,38.354
I2C1_SDA: J13.3 R14.1 U1.4 U3.P9_18 | length 25
  Top Layer w0.2: U1.4 51.946,37.081 52.642,36.386 v2@52.895,36.386 ; v2@53.141,36.14 53.141,35.886 55.499,33.528 63.849,33.528 65.405,31.972 U3.P9_18
  Bottom Layer w0.2: R14.1@50.28,35.941 50.534,36.195 v2(52.959,36.195) 55.022,36.195 J13.3
IMU_CSAG: U3.P8_43 U6.7 | length 30.6
  Bottom Layer w0.2: U6.7 74.93,66.054 80.901,72.025 94.885,72.025 U3.P8_43
IMU_CSM: U3.P8_44 U6.8 | length 34.3
  Bottom Layer w0.2: U6.8 72.39,64.25 80.619,72.479 94.704,72.479 97.155,74.93 97.155,76.835 U3.P8_44
IMU_DEN: U3.P8_29 U6.13 | length 30.9
  Bottom Layer w0.2: U6.13 59.69,67.31 66.675,74.295 66.675,76.073 67.437,76.835 79.375,76.835 U3.P8_29
IMU_DIN: J13.1 J13.2 U3.P8_27 U6.3 | length 64.4
  Top Layer w0.2: U6.3 73.66,43.815 73.66,63.514 78.105,67.959 U3.P8_27
  Bottom Layer w0.2: J13.2@56.445,35.941 57.642,35.941 60.182,38.481 73.152,38.481 76.581,41.91 76.581,43.053 75.508,44.126 73.971,44.126 U6.3
IMU_INT1: U3.P8_39 U6.11 | length 38.6
  Bottom Layer w0.2: U6.11 64.77,71 67.611,73.841 91.621,73.841 U3.P8_39
IMU_INT2: U3.P8_40 U6.12 | length 42.2
  Bottom Layer w0.2: U6.12 62.23,69.102 67.423,74.295 91.433,74.295 92.075,74.937 92.075,76.835 U3.P8_40
IMU_INTM: U3.P8_41 U6.10 | length 39.3
  Bottom Layer w0.2: U6.10 67.31,72.256 67.987,72.933 93.253,72.933 U3.P8_41
IMU_RDY: U3.P8_42 U6.9 | length 48
  Bottom Layer w0.2: U6.9 68.326,61.341 66.675,61.341 66.04,61.976 66.04,71.628 67.799,73.387 93.065,73.387 94.615,74.937 94.615,76.835 U3.P8_42
IMU_SCK: J14.2 J14.3 U3.P8_28 U6.4 | length 57.7
  Top Layer w0.2: U6.4 74.93,60.579 76.2,61.849 76.2,64.123 79.375,67.298 79.375,76.835 U3.P8_28
  Bottom Layer w0.2: J14.2@56.572,39.1 J14.3 71.485,39.1 U6.4
IMU_SDOAG: U3.P8_45 U6.5 | length 30.3
  Bottom Layer w0.2: U6.5 80.01,69.85 81.277,71.117 96.517,71.117 U3.P8_45
IMU_SDOM: U3.P8_46 U6.6 | length 33.8
  Bottom Layer w0.2: U6.6 77.47,67.952 81.089,71.571 96.189,71.571 99.695,75.077 99.695,76.835 U3.P8_46
LED1: Q1.2 R27.2 U3.P8_3 | length 11.3
  Top Layer w0.2: Q1.2 40.64,72.263 41.655,73.278 45.339,73.278 ; 45.338,73.278 U3.P8_3 U3.P8_3@47.625,76.2
LED2: Q1.5 R28.2 U3.P8_4 | length 19.7
  Top Layer w0.2: Q1.5@40.64,67.945 40.64,67.31 41.702,66.248 45.527,66.248 46.482,67.203 46.482,72.524 48.895,74.937 48.895,76.835 U3.P8_4
LED3: Q2.2 R29.2 U3.P8_5 | length 18.2
  Top Layer w0.2: U3.P8_5@50.171,75.559 46.863,72.251 46.863,66.548 47.244,66.167 50.292,66.167 50.927,65.532 R29.2 51.724,65.532 51.724,67.148 51.308,67.564 Q2.2
LED4: Q2.5 R30.2 U3.P8_6 | length 14.7
  Top Layer w0.2: U3.P8_6 51.435,76.835 51.435,74.676 55.372,70.739 55.372,67.945 54.991,67.564 Q2.5
M1_DIR: U3.P9_29 U4.20 | length 33.8
  Top Layer w0.2: U3.P9_29 81.153,27.305 81.153,27.373 81.915,28.135 81.915,41.536 87.369,46.99 88.775,46.99 89.254,46.511 89.254,44.677 v2(88.265,43.688)
  Bottom Layer w0.2: v2(88.265,43.688) 88.265,43.434 88.366,43.333 92.079,43.333 92.729,43.983 U4.20
M1_STEP: U3.P9_31 U4.22 | length 28.9
  Top Layer w0.2: U3.P9_31@83.82,27.305 U3.P9_31 84.455,28.575 84.455,32.766 82.462,34.759 82.462,41.441 86.614,45.593 v2(88.265,45.593)
  Bottom Layer w0.2: v2(88.265,45.593) 91.44,45.593 91.75,45.283 U4.22
M2_DIR: U3.P9_28 U5.20 | length 39.5
  Top Layer w0.2: U3.P9_28 78.105,30.353 79.375,31.623 79.375,39.624 83.693,43.942 83.693,51.943 v2(88.646,56.896)
  Bottom Layer w0.2: v2(88.646,56.896) 89.235,56.307 90.995,56.307 91.74,57.052 91.74,59.394 92.641,60.295 U5.20
M2_STEP: U3.P9_30 U5.22 | length 47.3
  Top Layer w0.2: U3.P9_30 79.375,28.575 77.353,28.575 76.835,29.093 76.835,37.806 83.185,44.156 83.185,57.023 86.741,60.579 v2(89.916,60.579)
  Bottom Layer w0.2: v2(89.916,60.579) 91.44,60.579 92.456,61.595 U5.22
M_EN: R17.1 R21.1 U3.P9_27 U4.21 U5.21 | length 55.5
  Top Layer w0.2: U3.P9_27 78.232,27.305 79.629,25.908 83.693,25.908 84.455,26.67 84.455,27.94 85.09,28.575 86.487,28.575 86.995,29.083 86.995,32.258 84.963,34.29 84.963,41.656 85.979,42.672 88.663,42.672 90.144,44.153 v2(90.144,44.49) 90.144,58.394 v2(90.551,58.801)
  Bottom Layer w0.2: v2(90.144,44.49) 90.144,44.476 90.551,44.069 R17.1 ; R21.1 90.398,57.176 90.551,57.329 v2(90.551,58.801) ; v2@90.398,58.783 92.56,60.945 U5.21 ; R17.1@91.478,44.057 92.054,44.633 U4.21
NetC1_1: C1.1 C4.2 R4.2 U1.13 U1.14 U1.15 | length 7.3
  Top Layer w0.2: R4.2 41.136,40.132 C1.1 C4.2 41.248,38.381 43.676,38.381 43.676,39.031 U1.13@43.676,39.681
NetC1_2: C1.2 R1.2 U1.12 | length 4.9
  Top Layer w0.2: R1.2 39.363,41.644 C1.2 41.414,41.644 42.727,40.331 U1.12@43.676,40.331
NetC3_2: C3.2 U1.7 | length 5.9
  Top Layer w0.2: U1.7 50.969,39.031 52.197,40.259 52.197,42.557 C3.2@52.578,42.938
NetC5_1: C5.1 U1.8 | length 5.3
  Top Layer w0.2: U1.8 49.692,39.716 50.892,39.716 51.689,40.513 51.689,41.677 C5.1@50.428,42.938
NetC8_1: C8.1 R6.2 U1.17 | length 6.2
  Top Layer w0.2: R6.2 39.497,36.83 41.148,35.179 43.05,37.081 U1.17
NetC14_1: C14.1 U4.1 | length 1.9
  Bottom Layer w0.2: U4.1 99.106,49.183 99.158,49.235 C14.1
NetC14_2: C14.2 U4.2 | length 3.5
  Bottom Layer w0.2: U4.2 99.647,48.533 100.658,49.544 C14.2
NetC15_1: C15.1 U4.3 | length 3.3
  Bottom Layer w0.2: U4.3 99.881,47.883 C15.1
NetC17_1: C17.1 R18.1 U4.15 | length 9.7
  Top Layer w0.2: R18.1@97.155,36.322 97.917,36.322 v2(97.917,35.324)
  Bottom Layer w0.2: U4.15@93.659,40.733 U4.15 93.402,39.047 C17.1@94.361,38.088 ; C17.1@94.484,38.211 94.829,38.211 97.717,35.324 v2(97.917,35.324)
NetC18_1: C18.1 U5.1 | length 2.2
  Bottom Layer w0.2: C18.1 99.06,67.207 U5.1
NetC18_2: C18.2 U5.2 | length 3.6
  Bottom Layer w0.2: U5.2 99.836,64.845 100.203,65.212 C18.2
NetC19_1: C19.1 U5.3 | length 3.3
  Bottom Layer w0.2: U5.3 99.919,64.195 101.104,65.38 C19.1
NetC21_1: C21.1 R22.1 U5.15 | length 8.3
  Top Layer w0.2: R22.1@97.11,53.356 98.663,53.356 v2(98.679,53.34)
  Bottom Layer w0.2: U5.15 95.195,55.36 C21.1 96.659,55.36 v2(98.679,53.34)
NetD1_1: D1.1 R11.2 | length 1.4
  Top Layer w0.2: R11.2 56.264,58.943 D1.1
NetD2_1: D2.1 R23.1 | length 4.1
  Top Layer w0.2: R23.1@43.561,67.127 43.561,68.072 D2.1 D2.1@45.593,70.355
NetD2_2: D2.2 Q1.6 | length 6.5
  Top Layer w0.2: Q1.6 42.631,67.777 44.577,69.723 44.577,70.739 D2.2@45.593,71.755
NetD3_1: D3.1 R24.1 | length 1.9
  Top Layer w0.2: R24.1 41.735,71.846 D3.1@43.18,71.846
NetD3_2: D3.2 Q1.3 | length 4.6
  Top Layer w0.2: Q1.3 39.99,69.484 40.386,69.088 42.164,69.088 43.18,70.104 D3.2@43.18,70.446
NetD4_1: D4.1 R25.1 | length 8.1
  Top Layer w0.2: D4.1 48.003,71.504 49.149,70.358 52.439,70.358 R25.1
NetD4_2: D4.2 Q2.6 | length 6.6
  Top Layer w0.2: D4.2@47.625,69.85 52.197,69.85 53.17,68.877 Q2.6
NetD5_1: D5.1 R26.1 | length 1.7
  Top Layer w0.2: D5.1@47.474,66.941 R26.1@49.125,66.941
NetD5_2: D5.2 Q2.3 | length 4.1
  Top Layer w0.2: D5.2@47.498,68.39 49.043,68.39 50.519,66.914 Q2.3
NetJ1_2: J1.2 R4.1 | length 3.6
  Top Layer w0.2: J1.2 35.589,40.132 R4.1
NetJ1_3: J1.3 R5.1 | length 4
  Top Layer w0.2: J1.3 36.438,38.481 R5.1
NetJ3_1: J3.1 U4.26 | length 8.5
  Bottom Layer w0.2: J3.1@86.633,49.911 J3.1 86.487,49.784 86.487,49.243 87.847,47.883 U4.26
NetJ4_1: J4.1 U4.10 | length 7.4
  Bottom Layer w0.2: J4.1 J4.1@104.648,40.078
  Bottom Layer w0.35: U4.10 99.998,43.333 100.883,42.448 102.278,42.448 J4.1@104.648,40.078
NetJ4_2: J4.2 U4.8 | length 6.7
  Bottom Layer w0.2: J4.2@104.001,42.303 J4.2
  Bottom Layer w0.35: U4.8 101.671,44.633 J4.2@104.001,42.303
NetJ4_3: J4.3 U4.7 | length 6.1
  Bottom Layer w0.35: U4.7 100.401,45.283 100.711,45.593 103.898,45.593 J4.3
NetJ4_4: J4.4 U4.5 | length 6
  Bottom Layer w0.35: U4.5 100.304,46.583 101.104,47.383 J4.4
NetJ5_1: J5.1 U4.25 | length 7
  Bottom Layer w0.2: J5.1 86.371,47.233 U4.25
NetJ6_1: J6.1 U4.24 | length 8.2
  Bottom Layer w0.2: J6.1 86.36,45.212 87.731,46.583 U4.24
NetJ7_1: J7.1 U5.26 | length 7.2
  Bottom Layer w0.2: J7.1 90.895,62.574 92.516,64.195 U5.26
NetJ8_1: J8.1 U5.10 | length 6.3
  Bottom Layer w0.35: U5.10 100.883,59.645 101.265,59.263 103.424,59.263 J8.1
NetJ8_2: J8.2 U5.8 | length 5.8
  Bottom Layer w0.2: J8.2@104.225,60.945 J8.2@104.648,60.522
  Bottom Layer w0.35: U5.8 J8.2@104.225,60.945
NetJ8_3: J8.3 U5.7 | length 6.2
  Bottom Layer w0.2: 102.271,62.532 102.273,62.53 ; J8.3@104.059,62.53 J8.3
  Bottom Layer w0.35: U5.7 101.334,61.595 102.271,62.532 ; 102.273,62.53 J8.3@104.059,62.53
NetJ8_4: J8.4 U5.5 | length 6.8
  Bottom Layer w0.2: J8.4@104.648,65.532 J8.4
  Bottom Layer w0.35: U5.5 100.868,62.895 103.505,65.532 J8.4@104.648,65.532
NetJ9_1: J9.1 U5.25 | length 8.1
  Bottom Layer w0.2: J9.1 89.298,62.12 91.083,62.12 92.508,63.545 U5.25
NetJ10_1: J10.1 U5.24 | length 10.2
  Bottom Layer w0.2: J10.1 86.995,58.191 87.724,58.92 87.724,59.904 89.486,61.666 91.271,61.666 92.5,62.895 U5.24
NetR7_2: R7.2 SW1.1 SW1.2 | length 42.5
  Top Layer w0.2: R7.2 40.881,32.144 44.45,28.575 45.72,28.575 46.355,27.94 46.355,26.543 46.99,25.908 63.373,25.908 64.135,26.67 64.135,31.316 SW1.1 SW1.2
NetR15_1: R15.1 U4.6 | length 4
  Bottom Layer w0.2: U4.6 100.36,45.933 100.77,46.343 R15.1@102.822,46.343
NetR16_1: R16.1 U4.9 | length 2.7
  Bottom Layer w0.2: U4.9 100.088,43.983 100.764,43.307 101.334,43.307 R16.1@101.346,43.319
NetR18_2: R18.2 U4.12 U4.13 | length 7.1
  Top Layer w0.2: v2(99.314,37.211) 100.994,37.211 R18.2@101.105,37.322
  Bottom Layer w0.2: U4.13 U4.12 ; v2(99.314,37.211) 99.949,37.846 99.949,41.059 U4.13@99.625,41.383
NetR19_1: R19.1 U5.6 | length 4.2
  Bottom Layer w0.2: U5.6 101.071,62.245 102.06,63.234 R19.1@102.822,63.234
NetR20_1: R20.1 U5.9 | length 2.8
  Bottom Layer w0.2: U5.9 101.503,60.295 R20.1@101.727,60.071
NetR22_2: R22.2 U5.12 U5.13 | length 5.8
  Top Layer w0.2: v2(100.203,55.88) 100.203,55.213 R22.2@101.06,54.356
  Bottom Layer w0.2: U5.12 U5.13 99.912,57.695 100.203,57.404 v2(100.203,55.88) v2@100.647,55.88
SRN: C10.1 C13.2 R9.2 U1.19 | length 8.8
  Top Layer w0.2: U1.19 47.15,35.781 49.034,33.897 R9.2 C13.2
SRP: C9.1 C10.2 R8.2 U1.18 | length 12.6
  Top Layer w0.2: U1.18@43.676,36.431 43.144,36.431 42.672,35.959 42.672,33.909 R8.2 C9.1 44.958,33.02 46.101,33.02 47.552,31.569 49.845,31.569 C10.2
TS1: R12.1 SW1.3 SW1.4 U1.6 | length 41
  Top Layer w0.2: U1.6 51.161,38.381 55.207,42.427 55.207,49.492 57.023,51.308 57.023,60.918 R12.1 ; 55.207,42.253 SW1.4 SW1.3
VBAT: C2.1 C7.2 C11.1 C15.2 C16.1 C19.2 C20.1 J1.1 R1.1 R2.2 U1.9 U2.1 U4.4 U4.11 U5.4 U5.11 | length 166
  Top Layer w0.2: C7.2@48.248,42.811 49.396,41.663 50.793,41.663 51.181,41.275 51.181,40.767 50.745,40.331 U1.9
  Top Layer w0.5: J1.1 34.644,41.639 R1.1 R2.2 37.858,43.561 38.493,44.196 C2.1 ; C7.2@48.248,42.811 43.322,42.811 41.937,44.196 C2.1 ; C11.1@48.641,59.055 48.641,56.769 U2.1 49.022,45.466 43.078,45.466 C2.1
  Bottom Layer w0.5: U2.1 55.626,52.07 C16.1 ; U4.11 99.823,42.683 100.569,41.937 100.569,40.528 103.124,37.973 105.283,37.973 106.426,39.116 106.426,51.435 C16.1@105.918,51.943 ; U4.4 100.104,47.233 101.131,48.26 101.981,48.26 103.028,49.307 C15.2 105.441,51.943 C16.1@105.918,51.943 ; U5.11 100.136,58.995 100.711,58.42 100.711,57.626 103.092,55.245 C20.1 ; U5.4 100.248,63.545 102.489,65.786 C19.2@102.489,66.04 ; C19.2 102.604,66.282 103.759,67.437 105.41,67.437 106.426,66.421 106.426,55.753 C20.1 ; C16.1@105.918,51.943 C16.1 ; C16.1 C20.1
VC1: C4.1 C6.2 R5.2 R7.1 U1.16 | length 10.7
  Top Layer w0.2: R7.1 C6.2 39.358,35.445 38.608,36.195 38.608,37.731 R5.2 40.858,36.981 C4.1 41.668,36.981 42.418,37.731 U1.16@43.676,37.731
VLED: J2.1 J11.1 J11.5 J11.9 J12.1 J12.5 J12.9 J15.1 | length 103.2
  Top Layer w0.5: J15.1 J2.1 ; J11.9 J11.5 J11.1
  Bottom Layer w0.5: J2.1 74.803,34.163 82.296,34.163 J12.1 ; J12.9 J12.5 J12.1 ; J11.9@90.805,64.77 J11.9 ; J11.1 108.712,69.85 110.744,67.818 110.744,41.656 102.997,33.909 85.344,33.909 J12.1
pads on no net: U1.1 U1.2 U1.11 U3.0 U3.P8_7 U3.P8_8 U3.P8_9 U3.P8_10 U3.P8_11 U3.P8_12 U3.P8_13 U3.P8_14 U3.P8_15 U3.P8_16 U3.P8_17 U3.P8_18 U3.P8_19 U3.P8_20 U3.P8_21 U3.P8_22 U3.P8_23 U3.P8_24 U3.P8_25 U3.P8_26 U3.P8_30 U3.P8_31 U3.P8_32 U3.P8_33 U3.P8_34 U3.P8_35 U3.P8_36 U3.P8_37 U3.P8_38 U3.P9_7 U3.P9_8 U3.P9_9 U3.P9_10 U3.P9_11 U3.P9_12 U3.P9_13 U3.P9_14 U3.P9_16 U3.P9_19 U3.P9_20 U3.P9_21 U3.P9_22 U3.P9_24 U3.P9_26 U3.P9_32 U3.P9_41 U3.P9_42 U4.18 U4.19 U4.23 U4.27 U5.18 U5.19 U5.23 U5.27 U6.0

## Polygon pours and split planes (outlines as drawn)
GND on Top Layer "Top Layer-No Net" (solid, remove dead copper, pour order 0): 25.4,46.101 45.72,46.101 45.72,64.389 31.115,64.389 31.115,80.01 111.76,80.01 111.76,25.4 25.4,25.4
GND on Bottom Layer "Top Layer-No Net1" (solid, remove dead copper, pour order 1): 25.4,46.101 45.72,46.101 45.72,64.389 31.115,64.389 31.115,80.01 111.76,80.01 111.76,25.4 25.4,25.4

## Keep-outs
Keep-Out Layer:
  lines w0.254: 25.4,31.75 ccw(c31.686,31.686) 31.75,25.4 99.06,25.4 ccw(c99.06,38.1) 111.76,38.1 111.76,67.31 ccw(c98.969,67.219) 99.06,80.01 31.115,80.01 31.115,64.389 45.72,64.389 45.72,46.101 25.4,46.101 25.4,31.75

## Silkscreen, mask and mechanical layers (free items; w line width, h text height)
Top Overlay:
  drawing of 1347 lines, arcs and shapes, not listed
  text "Sponsored by" at 34.879,77.97 h1.02 r270
  text "AIN2 / AIN1 / AIN0" at 97.282,74.041 h1.02 r180
  text "Northeastern University / IEEE Micromouse 2019" at 84.201,64.008 h0.97 r270
  text "LED ON" at 65.278,35.433 h1.02
  text "AIN6" at 67.437,32.294 h1.02
  text "AIN5 / AIN4 / AIN3" at 93.218,31.115 h1.02
Mechanical 1:
  drawing of 191 lines, arcs and shapes, not listed
  text "Layer" at 15.884,108.712 h1.52
  text "Name" at 26.295,108.712 h1.52
  text "Material" at 49.911,108.712 h1.52
  text "Thickness" at 71.749,108.712 h1.52
  text "Constant" at 88.255,108.712 h1.52
  text "Board Layer Stack" at 102.729,108.712 h1.52
  text "1" at 15.884,105.664 h1.52
  text "Top Overlay" at 26.295,105.664 h1.52
  text "2" at 15.884,102.616 h1.52
  text "Top Solder" at 26.295,102.616 h1.52
  text "Solder Resist" at 49.911,102.616 h1.52
  text "0.40mil" at 71.749,102.616 h1.52
  text "3.5" at 88.255,102.616 h1.52
  text "3" at 15.884,99.568 h1.52
  text "Top Layer" at 26.295,99.568 h1.52
  text "Copper" at 49.911,99.568 h1.52
  text "1.40mil" at 71.749,99.568 h1.52
  text "4" at 15.884,96.52 h1.52
  text "Dielectric 1" at 26.295,96.52 h1.52
  text "FR-4" at 49.911,96.52 h1.52
  text "59.39mil" at 71.749,96.52 h1.52
  text "4.8" at 88.255,96.52 h1.52
  text "5" at 15.884,93.472 h1.52
  text "Bottom Layer" at 26.295,93.472 h1.52
  text "Copper" at 49.911,93.472 h1.52
  text "1.40mil" at 71.749,93.472 h1.52
  text "6" at 15.884,90.424 h1.52
  text "Bottom Solder" at 26.295,90.424 h1.52
  text "Solder Resist" at 49.911,90.424 h1.52
  text "0.40mil" at 71.749,90.424 h1.52
  text "3.5" at 88.255,90.424 h1.52
  text "7" at 15.884,87.376 h1.52
  text "Bottom Overlay" at 26.295,87.376 h1.52
Drill Drawing:
  circle w0.254: c16.78,150.135 r0.847
  circle w0.254: c16.78,134.895 r0.508
  circle w0.254: c16.78,134.895 r0.847
  lines w0.254: 15.933,120.502 17.627,120.502 16.78,118.808 15.933,120.502 ; 15.933,122.618 15.933,123.042 16.357,123.465 15.933,123.888 15.933,124.312 16.357,124.312 16.78,123.888 17.203,124.312 17.627,124.312 17.627,123.888 17.203,123.465 17.627,123.042 17.627,122.618 17.203,122.618 16.78,123.042 16.357,122.618 15.933,122.618 ; 15.933,126.428 17.627,126.428 17.627,128.122 15.933,128.122 15.933,126.428 ; 15.933,130.238 17.627,130.238 17.627,131.932 15.933,131.932 15.933,130.238 ; 15.933,138.705 16.78,137.858 17.627,138.705 16.78,139.552 15.933,138.705 ; 15.933,142.092 16.357,142.092 16.78,141.668 17.203,142.092 17.627,142.092 17.203,142.515 17.627,142.938 17.203,142.938 16.78,143.362 16.357,142.938 15.933,142.938 16.357,142.515 15.933,142.092 ; 15.933,145.902 16.357,145.902 16.357,145.478 17.203,145.478 17.203,145.902 17.627,145.902 17.627,146.748 17.203,146.748 17.203,147.172 16.357,147.172 16.357,146.748 15.933,146.748 15.933,145.902 ; 15.933,153.099 16.78,153.522 17.627,153.099 17.203,153.945 17.627,154.792 16.78,154.368 15.933,154.792 16.357,153.945 15.933,153.099 ; 16.272,130.577 17.288,130.577 17.288,131.593 16.272,131.593 16.272,130.577
  lines w0.381: 14.414,117.665 290.537,117.665 ; 14.414,155.766 290.537,155.766 ; 28.407,113.855 28.407,159.576 ; 43.643,113.855 43.643,159.576 ; 72.844,113.855 72.844,159.576 ; 85.693,113.855 85.693,159.576 ; 104.332,113.855 104.332,159.576 ; 142.421,113.855 142.421,159.576 ; 157.403,113.855 157.403,159.576 ; 176.346,113.855 176.346,159.576 ; 199.961,113.855 199.961,159.576 ; 221.647,113.855 221.647,159.576 ; 255.52,113.855 255.52,159.576 ; 14.414,113.855 290.537,113.855 290.537,159.576 14.414,159.576 14.414,113.855
  text "Symbol" at 16.7,156.909 h1.83
  text "Count" at 29.55,156.909 h1.83
  text "Hole Size" at 44.786,156.909 h1.83
  text "Plated" at 73.987,156.909 h1.83
  text "Hole Type" at 86.836,156.909 h1.83
  text "Drill Layer Pair" at 105.475,156.909 h1.83
  text "Via/Pad" at 143.564,156.909 h1.83
  text "Pad Shape" at 158.546,156.909 h1.83
  text "Template" at 177.489,156.909 h1.83